# Altium PCB ti_lab_v1.0.PcbDoc
Units mil, origin at the board's own origin, x right, y up, seen from the top; angles counter-clockwise.
Board outline 7140.03 x 8380.03 mil, 2 copper layers (Top Layer, Bottom Layer); 143 components, 45 nets, 464 pads, 229 vias.
Unrouted connection lines stored in the file: 7.
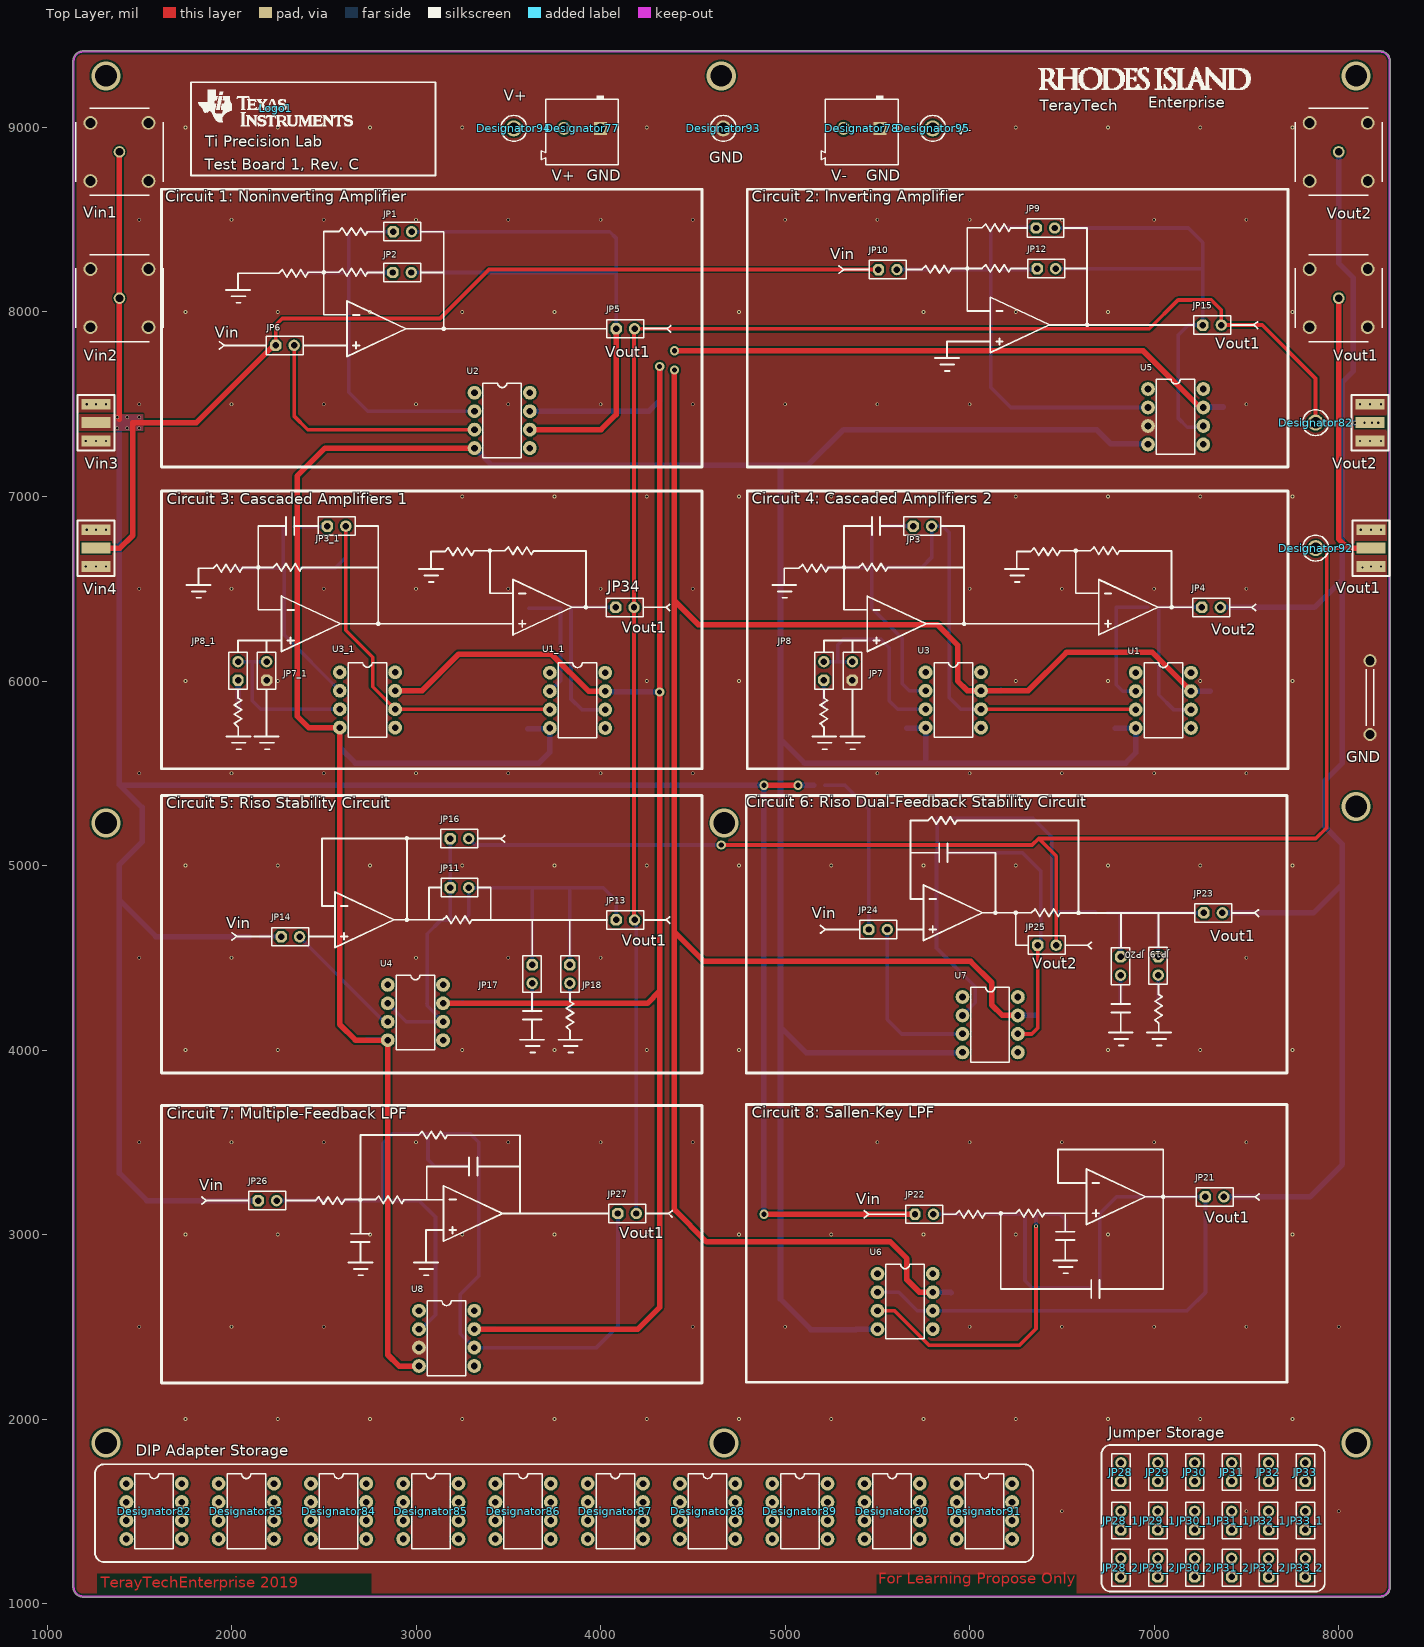
[diagram p0: Top Layer view]
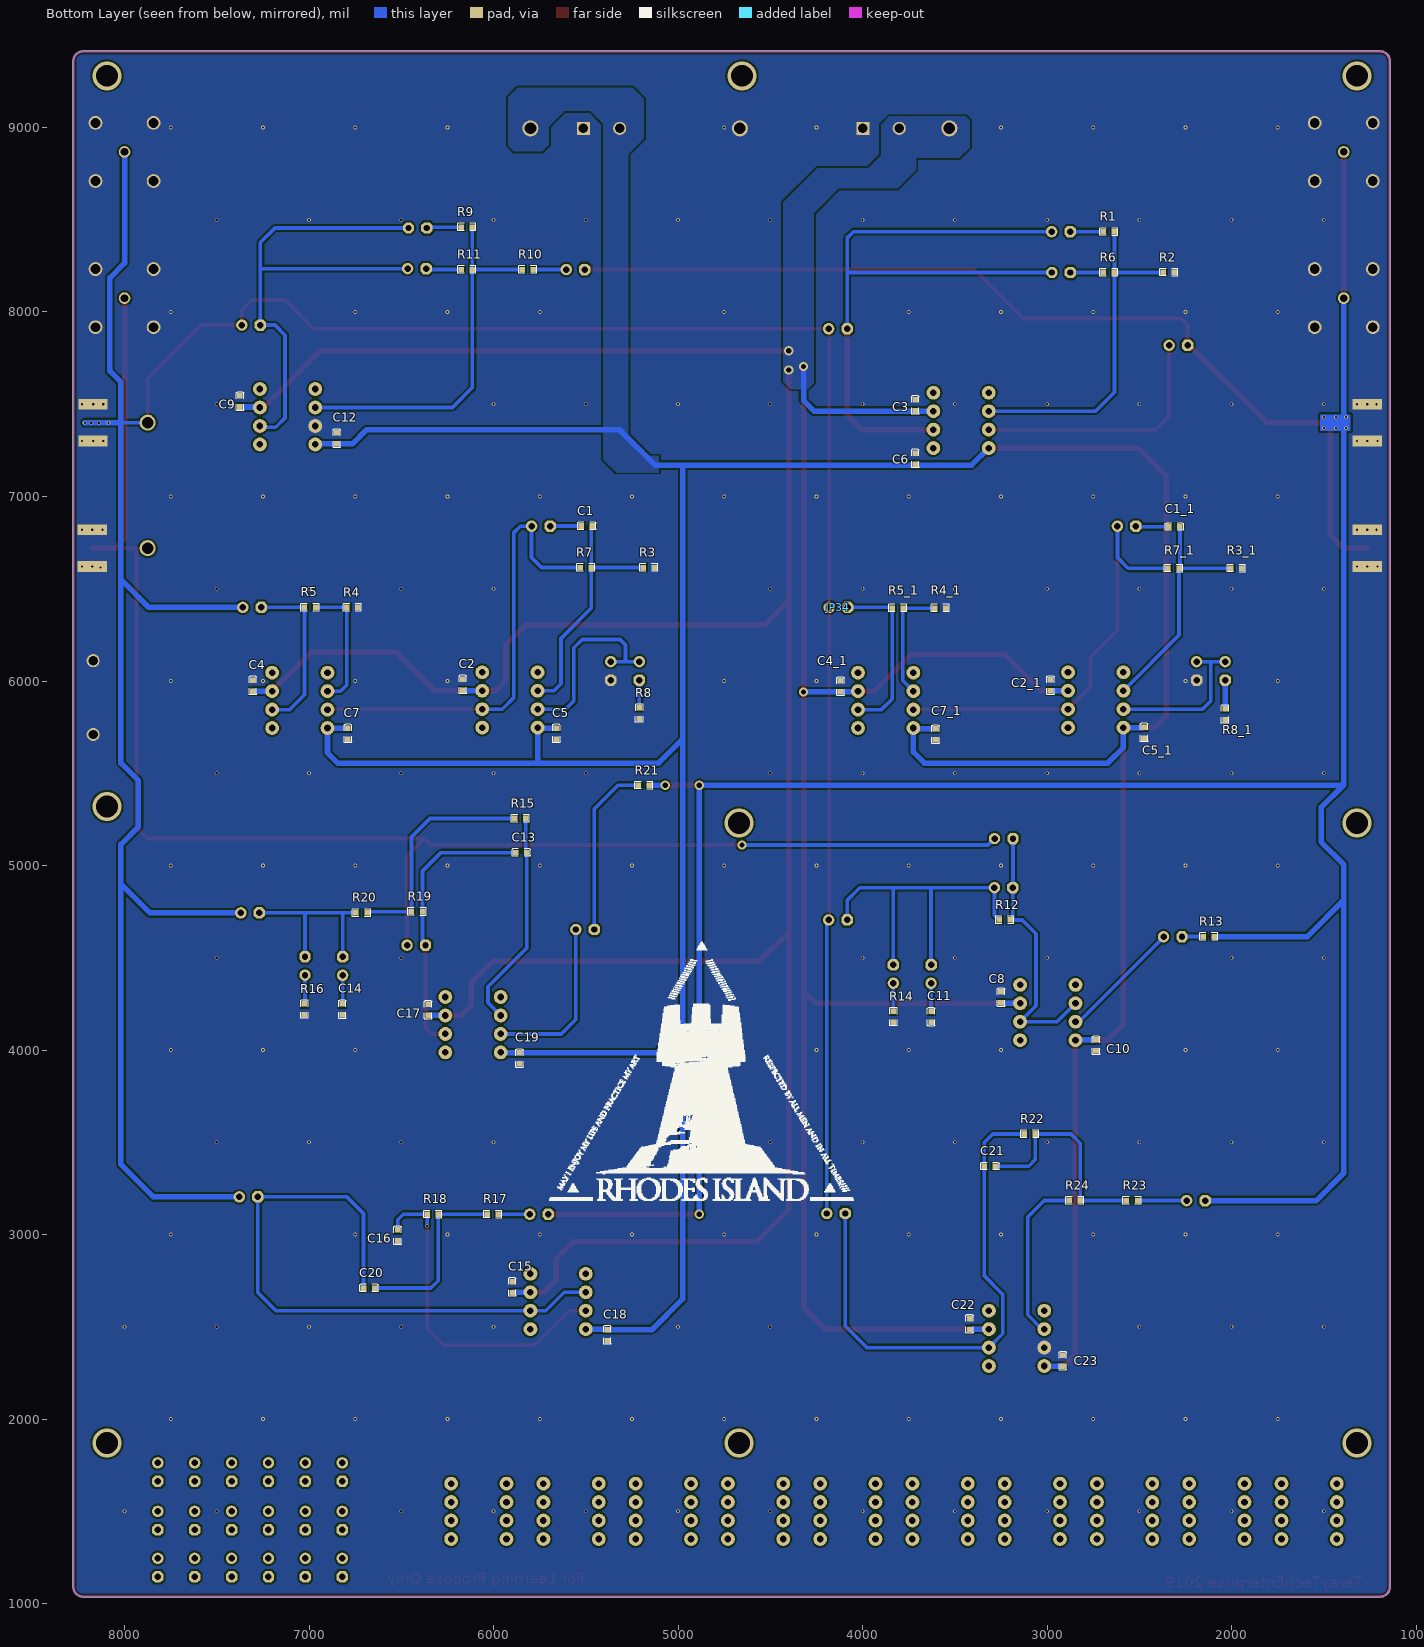
[diagram p1: Bottom Layer view, seen from below]
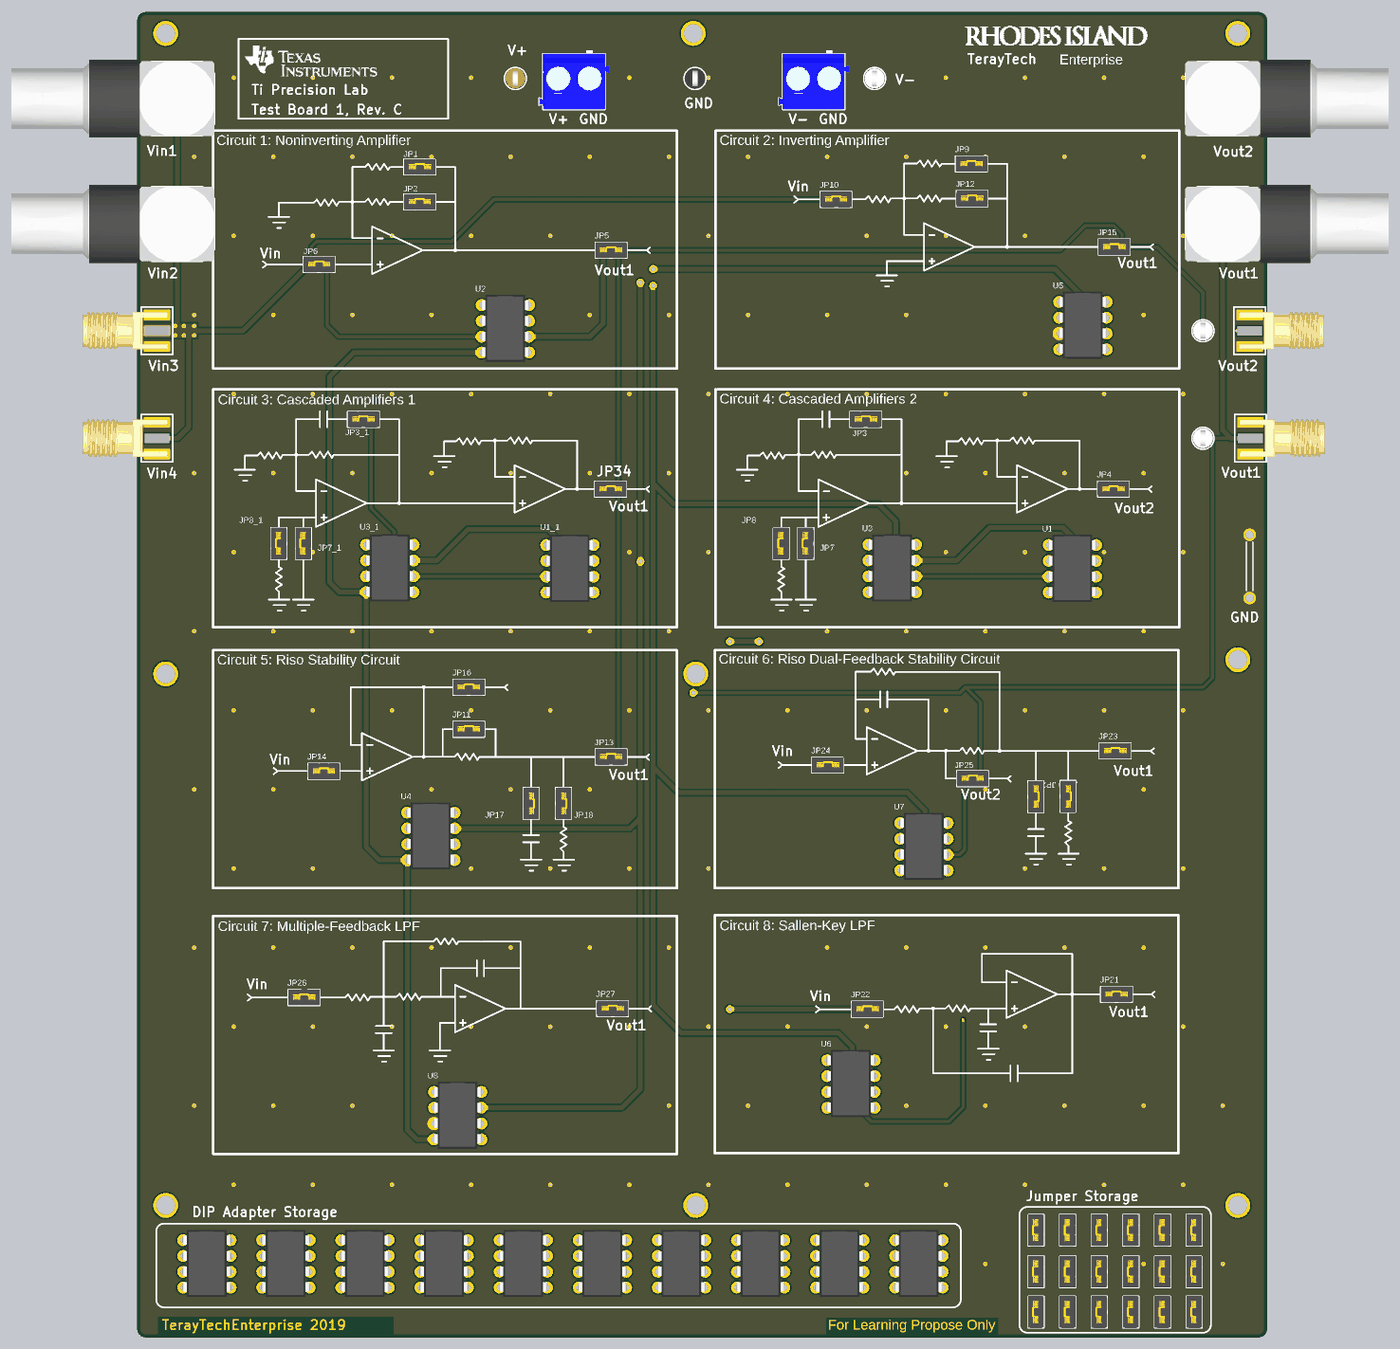
[diagram p2: 3D render of the assembled board from above, using the file's embedded part models]
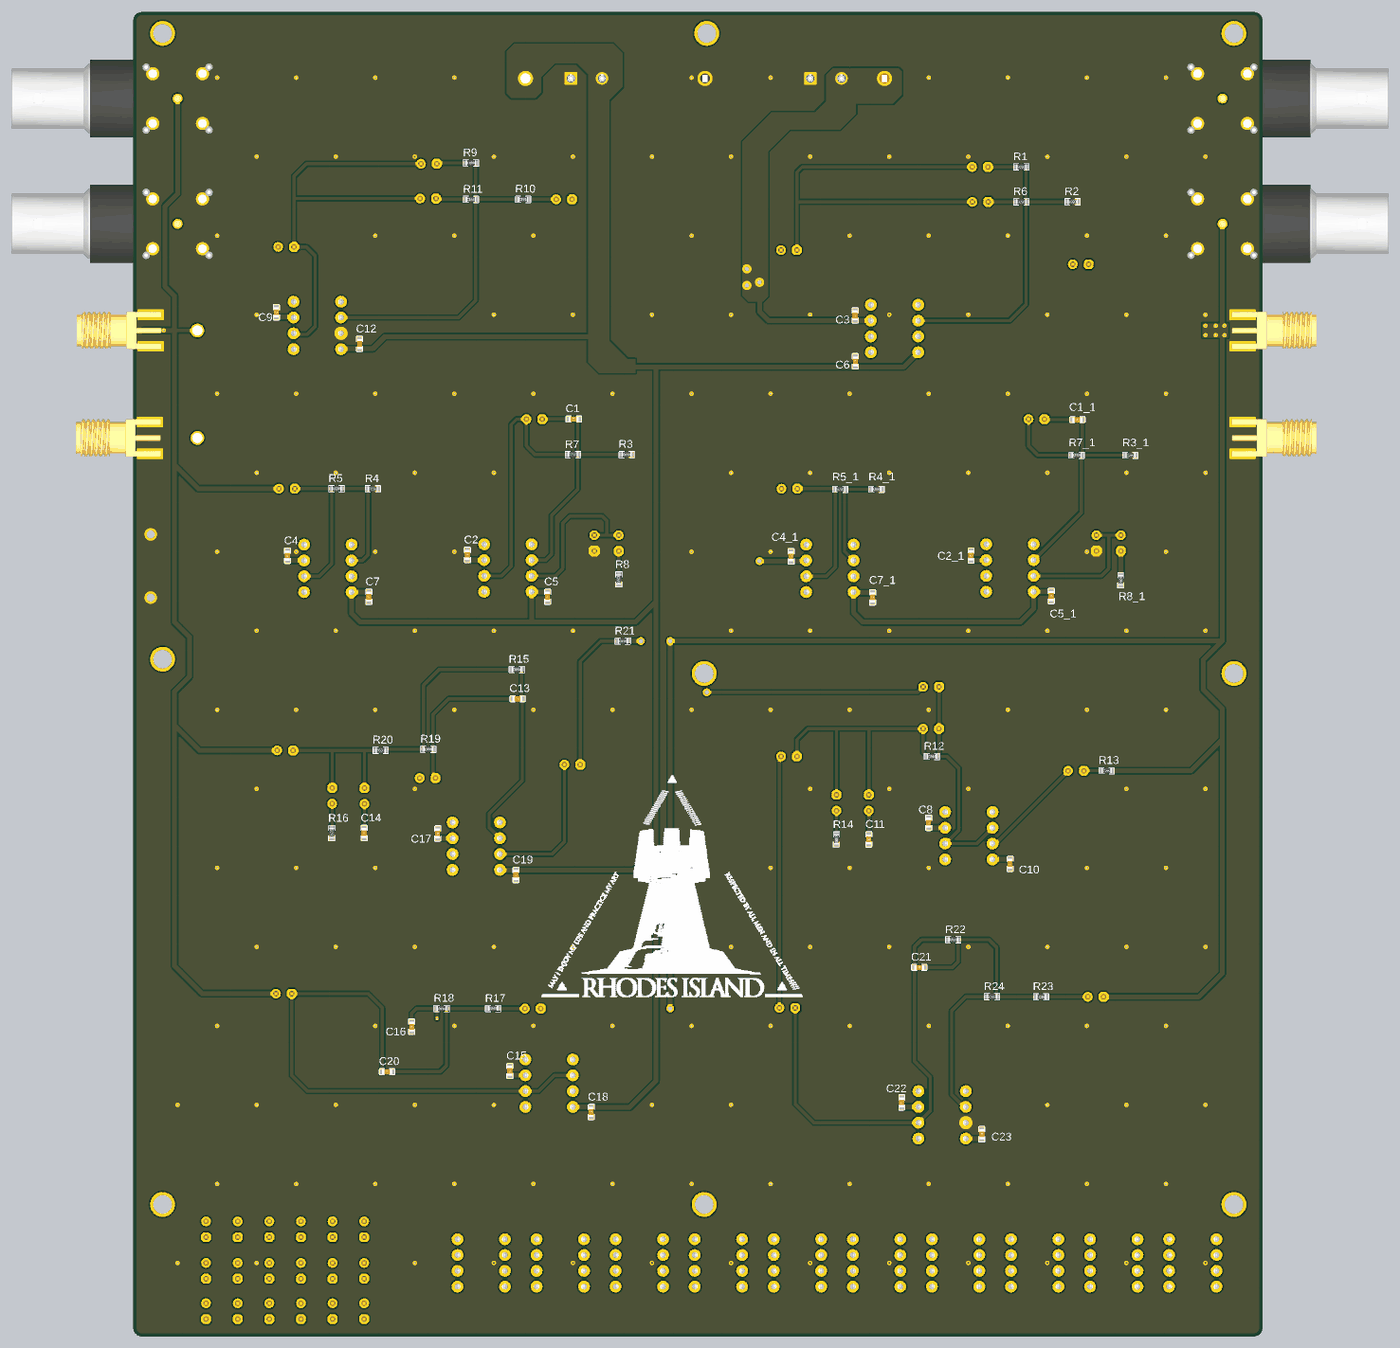
[diagram p3: 3D render of the assembled board from below, using the file's embedded part models]

## Layer stack, top to bottom
Top Solder: solder mask 0.4, Solder Resist, Dk 3.5
Top Layer: signal copper 1.4
Dielectric 1: dielectric 12.6, FR-4, Dk 4.8
Bottom Layer: signal copper 1.4
Bottom Solder: solder mask 0.4, Solder Resist, Dk 3.5

## Board outline
1139.98,1090 ccw(c1195,1090) 1195,1034.98 8225,1034.98 ccw(c8225,1090) 8280.01,1090 8280.01,9360 ccw(c8225,9360) 8225,9415.01 1195,9415.01 ccw(c1195,9360) 1139.98,9360

## Design rules (kind name [scope] priority, off if disabled: settings)
Clearance [All] p1: gap=10 ignorepadtopadclearanceinfootprint=FALSE except(0: Arc-Hole Track-Hole SMDPad-Hole THPad-Hole Via-Hole Fill-Hole Poly-Hole Region-Hole Text-Hole)
PolygonConnect [All] p1: connectstyle=Direct reliefconductorwidth=10 reliefentries=4 polygonreliefangle="90 Angle" airgapwidth=10
RoutingVias [All] p1: holewidth=28 width=50 viastyle="Through Hole" minholewidth=28 minwidth=50 maxholewidth=28 maxwidth=50
SolderMaskExpansion [All] p1: expansion=4
Width [All] p1: maxlimit=30 minlimit=10 preferedwidth=20 minimp=50.000000 maximp=50.000000 favimp=50.000000
30 further rules are at their usual default settings.

## Classes and differential pairs
component class ti_lab: C1 C2 C3 C4 C5 C6 C7 C8 C9 C10 C11 C12 C13 C14 C15 C16 C17 C18 C19 C20 C21 C22 C23 JP1 JP2 JP3 JP4 JP5 JP6 JP7 JP8 JP9 JP10 JP11 JP12 JP13 JP14 JP15 JP16 JP17 JP18 JP19 JP20 JP21 JP22 JP23 JP24 JP25 JP26 JP27 Logo1 R1 R2 R3 R4 R5 R6 R7 R8 R9 R10 R11 R12 R13 R14 R15 R16 R17 R18 R19 R20 R21 R22 R23 R24 U1 U2 U3 U4 U5 U6 U7 U8 Vin4 Vout1 Vout2

## Components (designator, comment, footprint, x,y, rotation, side; value= is the part's Value field where it differs from the comment)
C1 "0.01uF" 0603_C 5495,6840 r0 bottom value=104
C1_1 "0.01uF" 0603_C 2310,6836 r0 bottom value=104
C2 "1uF" 0603_C 6167.28,5980 r90 bottom value=104
C2_1 "1uF" 0603_C 2982.28,5976 r90 bottom value=104
C3 "1uF" 0603_C 3715,7495 r90 bottom value=104
C4 "1uF" 0603_C 7305,5975 r90 bottom value=104
C4_1 "1uF" 0603_C 4120,5971 r90 bottom value=104
C5 "1uF" 0603_C 5660,5715 r90 bottom value=104
C5_1 "1uF" 0603_C 2475,5720 r90 bottom value=104
C6 "1uF" 0603_C 3715,7205 r270 bottom value=104
C7 "1uF" 0603_C 6790,5715 r90 bottom value=104
C7_1 "1uF" 0603_C 3605,5711 r90 bottom value=104
C8 "1uF" 0603_C 3250,4285 r90 bottom value=104
C9 "1uF" 0603_C 7375,7515 r90 bottom value=104
C10 "1uF" 0603_C 2735,4025 r90 bottom value=104
C11 "1uF" 0603_C 3629,4180 r90 bottom value=104
C12 "1uF" 0603_C 6850,7315 r270 bottom value=104
C13 "1uF" 0603_C 5850,5070 r0 bottom value=104
C14 "1uF" 0603_C 6820,4220 r90 bottom value=104
C15 "1uF" 0603_C 5899,2715 r90 bottom value=104
C16 "1uF" 0603_C 6520,2995 r270 bottom value=104
C17 "1uF" 0603_C 6355,4217.28 r90 bottom value=104
C18 "1uF" 0603_C 5384,2455 r90 bottom value=104
C19 "1uF" 0603_C 5860,3955 r90 bottom value=104
C20 "0.01uF" 0603_C 6675,2710 r0 bottom value=104
C21 "10nF" 0603_C 3310,3370 r0 bottom value=104
C22 "1uF" 0603_C 3420,2515 r90 bottom value=104
C23 "1uF" 0603_C 2915,2315 r270 bottom value=104
Designator77 "Comment" Wurth_691101710002 3900,8995 r180 top
Designator78 "Comment" Wurth_691101710002 5415,8995 r180 top
Designator82 "Comment" Keystone5007 7875,7400 r270 top
Designator82 "Comment" DIP-8 1583.54,1522.72 r270 top
Designator83 "Comment" DIP-8 2083.54,1522.72 r270 top
Designator84 "Comment" DIP-8 2583.54,1522.72 r270 top
Designator85 "Comment" DIP-8 3083.54,1522.72 r270 top
Designator86 "Comment" DIP-8 3583.54,1522.72 r270 top
Designator87 "Comment" DIP-8 4083.54,1522.72 r270 top
Designator88 "Comment" DIP-8 4583.54,1522.72 r270 top
Designator89 "Comment" DIP-8 5083.54,1522.72 r270 top
Designator90 "Comment" DIP-8 5583.54,1522.72 r270 top
Designator91 "Comment" DIP-8 6083.54,1522.72 r270 top
Designator92 "Comment" Keystone5007 7875,6720 r270 top
Designator93 "Comment" Keystone5006 4665,8995 r270 top
Designator94 "Comment" Keystone5005 3530,8995 r270 top
Designator95 "Comment" Keystone5007 5800,8995 r270 top
GND "Comment" Harwin_D3082-05 8170,5910 r90 top
JP1 "jumper" jumper#1 2875.51,8435 r0 top
JP2 "jumper" jumper#1 2874,8214 r0 top
JP3 "jumper" jumper#1 5694,6839 r0 top
JP3_1 "jumper" jumper#1 2519,6839 r0 top
JP4 "jumper" jumper#1 7259,6399 r0 top
JP5 "jumper" jumper#1 4084,7909 r0 top
JP6 "jumper" jumper#1 2239,7819 r0 top
JP7 "jumper" jumper#1 5365,6005 r90 top
JP7_1 "jumper" jumper#1 2190,6005 r90 top
JP8 "jumper" jumper#1 5210,6005 r90 top
JP8_1 "jumper" jumper#1 2035,6005 r90 top
JP9 "jumper" jumper#1 6361,8455 r0 top
JP10 "jumper" jumper#1 5506,8230 r0 top
JP11 "jumper" jumper#1 3185.46,4880 r0 top
JP12 "jumper" jumper#1 6366,8235 r0 top
JP13 "jumper" jumper#1 4084,4705 r0 top
JP14 "jumper" jumper#1 2269,4614 r0 top
JP15 "jumper" jumper#1 7264,7929 r0 top
JP16 "jumper" jumper#1 3185,5146 r0 top
JP17 "jumper" jumper#1 3629,4462 r270 top
JP18 "jumper" jumper#1 3833.12,4462 r270 top
JP19 "jumper" jumper#1 6818,4505.12 r270 top
JP20 "jumper" jumper#1 7022.12,4506.12 r270 top
JP21 "jumper" jumper#1 7278,3204 r0 top
JP22 "jumper" jumper#1 5704,3110 r0 top
JP23 "jumper" jumper#1 7270,4743.24 r0 top
JP24 "jumper" jumper#1 5454,4653.12 r0 top
JP25 "jumper" jumper#1 6369,4568.12 r0 top
JP26 "jumper" jumper#1 2144,3184 r0 top
JP27 "jumper" jumper#1 4094,3114 r0 top
JP28 "jumper" jumper#1 6820,1663 r90 top (schematic designator JP21)
JP28_1 "jumper" jumper#1 6820,1400 r90 top (schematic designator JP21)
JP28_2 "jumper" jumper#1 6820,1145 r90 top (schematic designator JP21)
JP29 "jumper" jumper#1 7020,1663 r90 top (schematic designator JP21)
JP29_1 "jumper" jumper#1 7020,1400 r90 top (schematic designator JP21)
JP29_2 "jumper" jumper#1 7020,1145 r90 top (schematic designator JP21)
JP30 "jumper" jumper#1 7220,1663 r90 top (schematic designator JP21)
JP30_1 "jumper" jumper#1 7220,1400 r90 top (schematic designator JP21)
JP30_2 "jumper" jumper#1 7220,1145 r90 top (schematic designator JP21)
JP31 "jumper" jumper#1 7420,1663 r90 top (schematic designator JP21)
JP31_1 "jumper" jumper#1 7420,1400 r90 top (schematic designator JP21)
JP31_2 "jumper" jumper#1 7420,1145 r90 top (schematic designator JP21)
JP32 "jumper" jumper#1 7620,1663 r90 top (schematic designator JP21)
JP32_1 "jumper" jumper#1 7620,1400 r90 top (schematic designator JP21)
JP32_2 "jumper" jumper#1 7620,1145 r90 top (schematic designator JP21)
JP33 "jumper" jumper#1 7820,1663 r90 top (schematic designator JP21)
JP33_1 "jumper" jumper#1 7820,1400 r90 top (schematic designator JP21)
JP33_2 "jumper" jumper#1 7820,1145 r90 top (schematic designator JP21)
JP34 "jumper" jumper#2 4081.05,6399 r0 bottom (schematic designator JP4)
Logo1 "Texas Instruments" TI_Stacked_Overlay_Small 2239,9105 r0 top
R1 "10K" 0603_R 2665,8435 r0 bottom value=1K
R2 "1K" 0603_R 2340,8215 r0 bottom
R3 "1K" 0603_R 5160,6615 r0 bottom
R3_1 "1K" 0603_R 1975,6611 r0 bottom
R4 "1K" 0603_R 6765,6399 r0 bottom
R4_1 "1K" 0603_R 3580,6395 r0 bottom
R5 "20K" 0603_R 6995,6399 r0 bottom value=1K
R5_1 "20K" 0603_R 3810,6395 r0 bottom value=1K
R6 "100K" 0603_R 2665,8214 r0 bottom value=1K
R7 "100K" 0603_R 5500,6615 r0 bottom value=1K
R7_1 "100K" 0603_R 2315,6611 r0 bottom value=1K
R8 "5K" 0603_R 5210,5825 r90 bottom value=1K
R8_1 "5K" 0603_R 2035,5820 r90 bottom value=1K
R9 "10K" 0603_R 6145,8460 r0 bottom value=1K
R10 "1K" 0603_R 5815,8230 r0 bottom
R11 "100K" 0603_R 6145,8230 r0 bottom value=1K
R12 "100" 0603_R 3230,4705 r0 bottom value=1K
R13 "100" 0603_R 2125,4615 r0 bottom value=1K
R14 "100" 0603_R 3833.12,4180 r90 bottom value=1K
R15 "4.87K" 0603_R 5855,5255 r0 bottom value=1K
R16 "100" 0603_R 7025,4220 r90 bottom value=1K
R17 "4.87K" 0603_R 6005,3110 r0 bottom value=1K
R18 "14.7K" 0603_R 6330,3110 r0 bottom value=1K
R19 "100" 0603_R 6415,4750 r0 bottom value=1K
R20 "4.99" 0603_R 6715.8,4743.24 r180 bottom value=1K
R21 "100" 0603_R 5185,5435 r0 bottom value=1K
R22 "11.3K" 0603_R 3095,3545 r0 bottom value=1K
R23 "11.3K" 0603_R 2540,3184 r0 bottom value=1K
R24 "5.76K" 0603_R 2850,3185 r0 bottom value=1K
U1 "TI-OPA-8_1" DIP-8 7053.54,5917.72 r270 top
U1_1 "TI-OPA-8_1" DIP-8 3878.54,5917.72 r270 top
U2 "TI-OPA-8_1" DIP-8 3470,7435 r270 top
U3 "TI-OPA-8_1" DIP-8 5915,5920 r270 top
U3_1 "TI-OPA-8_1" DIP-8 2740,5920 r270 top
U4 "TI-OPA-8_1" DIP-8 3000,4226 r270 top
U5 "TI-OPA-8_1" DIP-8 7120,7455 r270 top
U6 "TI-OPA-8_1" DIP-8 5654,2660 r270 top
U7 "TI-OPA-8_1" DIP-8 6115,4160 r270 top
U8 "TI-OPA-8_1" DIP-8 3169,2460 r270 top
Vin1 "Comment" BNC-8X8 1392.52,8867.48 r90 top
Vin2 "Comment" BNC-8X8 1392.52,8075 r90 top
Vin3 "SMA-KHD" SMA-2 1265,7400 r270 top (schematic designator IN1)
Vin4 "SMA-KHD" SMA-2 1265,6720 r270 top
Vout1 "Comment" BNC-8X8 8000,8075 r270 top
Vout1 "SMA-KHD" SMA-2 8175,6720 r90 top (schematic designator OUT1)
Vout2 "Comment" BNC-8X8 8000,8867.48 r270 top
Vout2 "SMA-KHD" SMA-2 8170,7400 r90 top (schematic designator OUT2)

## Footprints (in the part's own frame and the unit in brackets; to place one, negate y for a bottom-side part, rotate by r counter-clockwise, add the part's x,y. Pads: shape width x height; smd on the part's side, far side on the other; paste and mask are expansions set on the pad)
0603_C [mil] "Capacitor"
  rect 30x30 smd: 1(-30,0) 2(30,0)
  silkscreen extent -50,-20 50,20, body extent -51,-18 52,21, height 35
0603_R [mil]
  rect 30x30 smd: 1(-30,0) 2(30,0)
  silkscreen extent -49,-20 49,21, body extent -32,-16 31,16, height 18
BNC-8X8 [mm]
  round 1.6 hole 1.05: 1(0,0)
  round 1.9 hole 1.35: MH(-4,-4) MH(-4,4) MH(4,-4) MH(4,4)
  silkscreen extent -6,-6 6,6, body extent -6.25,-6 6.25,26.6, height 15.25
DIP-8 [mil]
  round 75 hole 36: 1(-127.28,-153.54) 2(-27.28,-153.54) 3(72.72,-153.54) 4(172.72,-153.54) 5(172.72,146.46) 6(72.72,146.46) 7(-27.28,146.46) 8(-127.28,146.46)
  silkscreen extent -180,-108 225,101, body extent -193,-158 233,148, height 177
Harwin_D3082-05 [mm] "Shorting Plug, 10.16mm spacing, TH"
  round 1.8 hole 1.3: 1(-5.08,0) 2(5.08,0)
  silkscreen extent -3.9,-0.53 3.9,0.53, body extent -5.6,-0.52 5.61,0.52, height 6.63
jumper#1 [mil]
  round 1 on Mech3: 0(51,1)
  oct 62x62 hole 35: 1(0,0)
  round 62 hole 35: 2(100,0)
  silkscreen extent -50,-50 150,50, body extent -50,-50 151,51, height 398
jumper#2 [mil]
  round 1 on Mech3: 0(51,-1)
  oct 62x62 hole 35: 1(0,0)
  round 62 hole 35: 2(100,0)
  body extent -50,-51 151,50, height 398
Keystone5005 [mil] "Keystone Compact loops"
  round 87 hole 63: 1(0,0)
  silkscreen extent -70,-70 70,70, body extent -63,-63 62,63, height 225
Keystone5006 [mil] "Keystone Compact loops"
  round 87 hole 63: 1(0,0)
  silkscreen extent -70,-70 70,70, body extent -63,-63 62,63, height 225
Keystone5007 [mil] "Keystone Compact loops"
  round 87 hole 63: 1(0,0)
  silkscreen extent -70,-70 70,70, body extent -63,-63 62,63, height 225
SMA-2 [mm]
  rect 1.5x4 all layers, no hole: 1(-2.54,0) 1(2.54,0)
  rect 1.5x4 smd: 2(0,0)
  silkscreen extent -3.81,-2.54 3.81,2.54, body extent -3,-11.89 3,1.71, height 3.2
TI_Stacked_Overlay_Small [mil]
  silkscreen extent -418,-98 418,98
Wurth_691101710002 [mm] "Terminal Block, 5 mm, 2x1, TH"
  rect 1.8x1.8 hole 1.3: 1(-2.5,0)
  round 1.8 hole 1.3: 2(2.5,0)
  silkscreen extent -5,-4.5 5.6,5, body extent -5.6,-4 5.6,5, height 12.5

## Part data
C1 C1_1 C2 C2_1 C3 C4 C4_1 C5 C5_1 C6 C7 C7_1 C8 C9 C10 C11 C12 C13 C14 C15 C16 C17 C18 C19 C20 C21 C22 C23: library part CAP, "Capacitor", LatestRevisionDate=17-Jul-2002, LatestRevisionNote="Re-released for DXP Platform.", PackageReference=RAD-0.3, Published=8-Jun-2000, Publisher="Altium Limited"
JP1 JP2 JP3 JP3_1 JP4 JP5 JP6 JP7 JP7_1 JP8 JP8_1 JP9 JP10 JP11 JP12 JP13 JP14 JP15 JP16 JP17 JP18 JP19 JP20 JP21 JP22 JP23 JP24 JP25 JP26 JP27 JP28 JP28_1 JP28_2 JP29 JP29_1 JP29_2 JP30 JP30_1 JP30_2 JP31 JP31_1 JP31_2 JP32 JP32_1 JP32_2 JP33 JP33_1 JP33_2 JP34: "t跳线帽"
Logo1: library part TI_Logo, "Texas Instrument Corporate Signature", ClassName=Logo, LatestRevisionDate=2011-10-25, LatestRevisionNote="Added ClassName of Logo.", Published=2009-03-03, Publisher="National Semiconductor", SymbolCreator=codlsc, SymbolVersion=2011-08-22
R1 R2 R3 R3_1 R4 R4_1 R5 R5_1 R6 R7 R7_1 R8 R8_1 R9 R10 R11 R12 R13 R14 R15 R16 R17 R18 R19 R20 R21 R22 R23 R24: library part RES, "Resistor", Published=8-Jun-2000, Publisher="Altium Limited", Revision="July-2002: Re-released for DXP Platform."
Vin3 Vin4 Vout1 Vout2: library part SMA_KHD

## Via types
v1: diameter 20, hole 12, Top Layer to Bottom Layer, 212 vias
v2: diameter 157.48, hole 118.11, Top Layer to Bottom Layer, 9 vias
v3: diameter 50, hole 28, Top Layer to Bottom Layer, 8 vias

## Nets (pads, with @x,y where several pads share a name; then routed paths per layer and width w, separated by ;. In a path a pad name is that pad's centre, name@x,y a point inside that pad or via, vN(x,y) a via of type N, cw(c..) or ccw(c..) an arc to the next point about the centre after c; other vN are vias at no path point)
GND: C2.2 C2_1.2 C3.2 C4.2 C4_1.2 C5.1 C5_1.1 C6.1 C7.1 C7_1.1 C8.2 C9.2 C10.1 C11.1 C12.1 C14.1 C15.2 C16.2 C17.2 C18.1 C19.1 C22.2 C23.1 Designator77.1 Designator78.1 Designator93.1 GND.1 GND.2 JP7.1 JP7_1.1 R2.1 R3.1 R3_1.1 R4.1 R4_1.1 R8.1 R8_1.1 R14.1 R16.1 U5.3 U8.3 Vin1.MH Vin2.MH Vin3.1 Vin4.1 Vout1.1@8175,6620 Vout1.1@8175,6820 Vout1.MH Vout2.1@8170,7300 Vout2.1@8170,7500 Vout2.MH
  other v1: 1500,1500 2000,1500 2500,1500 3000,1500 3500,1500 4000,1500 4500,1500 5000,1500 5500,1500 6000,1500 6500,1500 7500,1500 8000,1500 1750,2000 2250,2000 2750,2000 3250,2000 3750,2000 4250,2000 4750,2000 5250,2000 5750,2000 6250,2000 6750,2000 7250,2000 7750,2000 1500,2500 2000,2500 2500,2500 4500,2500 5000,2500 6000,2500 6500,2500 7000,2500 7500,2500 8000,2500 1750,3000 2250,3000 2750,3000 3250,3000 3750,3000 4250,3000 4750,3000 5250,3000 5750,3000 6250,3000 6750,3000 7750,3000 1500,3500 2000,3500 2500,3500 3000,3500 3500,3500 4000,3500 4500,3500 5500,3500 6000,3500 6500,3500 7000,3500 7500,3500 1750,4000 2250,4000 3250,4000 3750,4000 4250,4000 4750,4000 6750,4000 7250,4000 7750,4000 1500,4500 2000,4500 3000,4500 3500,4500 4000,4500 6500,4500 7500,4500 1750,5000 2250,5000 2750,5000 3250,5000 3750,5000 4250,5000 4750,5000 5250,5000 5750,5000 6250,5000 6750,5000 7250,5000 7750,5000 1500,5500 2000,5500 2500,5500 3000,5500 3500,5500 4000,5500 4500,5500 5500,5500 6000,5500 6500,5500 7000,5500 7500,5500 1750,6000 2250,6000 4250,6000 4750,6000 6250,6000 6750,6000 7250,6000 7750,6000 1500,6500 2000,6500 2500,6500 3000,6500 3500,6500 4000,6500 4500,6500 6000,6500 6500,6500 7000,6500 7500,6500 8130,6615 1210,6620 1265,6620 1320,6620 8175,6620 8230,6620 1215,6820 1265,6820 1320,6820 8120,6820 8175,6820 8230,6820 1750,7000 2250,7000 2750,7000 3250,7000 3750,7000 4250,7000 4750,7000 5250,7000 5750,7000 6250,7000 6750,7000 7250,7000 7750,7000 1210,7300 1265,7300 1320,7300 8115,7300 8170,7300 8230,7300 1215,7500 1265,7500 1320,7500 1500,7500 2000,7500 2500,7500 3000,7500 3500,7500 4000,7500 4500,7500 5000,7500 5500,7500 6000,7500 7500,7500 8115,7500 8170,7500 8230,7500 1750,8000 2250,8000 2750,8000 3250,8000 3750,8000 4750,8000 5750,8000 6250,8000 6750,8000 7750,8000 1500,8500 2000,8500 2500,8500 3000,8500 3500,8500 4000,8500 4500,8500 5000,8500 5500,8500 6000,8500 6500,8500 7000,8500 7500,8500 1750,9000 2250,9000 2750,9000 3250,9000 4250,9000 4750,9000 6250,9000 6750,9000 7250,9000 7750,9000
NetC1_1: C1.1 C1_1.1 R3.2 R3_1.2 R7.1 R7_1.1 U3.2 U3_1.2 | length 2645.2
  Bottom Layer w20: R3_1.2 R7_1.1 ; C1_1.1 2280,6616 R7_1.1 ; U3_1.2 2285,6248.74 R7_1.1 ; R3.2@5190,6610 5195,6615 R7.1 ; C1.1 5470,6835 R7.1 ; U3.2 5672.72,5947.28 5635,5985 5635,6230 5470,6395 R7.1
NetC1_2: C1.2 C1_1.2 JP3.1 JP3_1.1 | length 349.7
  Bottom Layer w20: C1_1.2 2516,6836 JP3_1.1 ; C1.2 5693,6840 JP3.1
NetC11_2: C11.2 JP17.2 | length 152
  Bottom Layer w20: C11.2 JP17.2
NetC13_1: C13.1 R15.1 U7.2 | length 1185.2
  Bottom Layer w20: R15.1 5825,5075 C13.1 5820,4553.28 6030,4343.28 6030,4255.83 U7.2
NetC13_2: C13.2 JP25.1 R19.1 U7.6 | length 1524.7
  Top Layer w20: U7.6 6337.28,4087.28 6369,4119 JP25.1
  Bottom Layer w20: C13.2 6285,5070 6385,4970 R19.1 6385,4584.12 JP25.1
NetC14_2: C14.2 JP19.2 | length 155.9
  Bottom Layer w20: JP19.2 6818,4252 C14.2
NetC16_1: C16.1 R18.2 U6.3 | length 1821.8
  Top Layer w20: U6.3 5592.72,2587.28 5780,2400 6270,2400 6360,2490 v1(6360,3045)
  Bottom Layer w20: v1(6360,3045) R18.2 6490,3110 6520,3080 C16.1
NetC20_1: C20.1 R17.2 R18.1 | length 986.6
  Bottom Layer w20: R17.2 R18.1 6300,2750 6340,2710 C20.1
NetC20_2: C20.2 JP21.1 U6.2 U6.6 | length 3391.8
  Bottom Layer w20: U6.2 5616.72,2687.28 5716.72,2587.28 U6.6 7178.74,2587.28 7278,2686.54 JP21.1 6795,3204 6705,3114 C20.2
NetC21_1: C21.1 R22.1 R23.2 R24.1 | length 1184.2
  Bottom Layer w20: R23.2 R24.1@2809,3184 ; R24.1 2820,3495 2870,3545 R22.1 3065,3405 3100,3370 C21.1
NetC21_2: C21.2 JP27.1 R22.2 U8.6 | length 2855.9
  Bottom Layer w20: R22.2 3295,3545 3340,3500 C21.2 3340,2775 3240,2675 3240,2462.74 U8.6 3977.28,2387.28 4094,2504 JP27.1
NetIN1_2: JP6.1 JP10.1 JP22.1 JP26.1 R13.1 R21.1 Vin1.1 Vin2.1 Vin3.2 Vin4.2 | length 20079.7
  Top Layer w20: JP6.1@2239,7830 2239,7929 2275,7965 3130,7965 3395,8230 JP10.1
  Top Layer w30: Vin4.2 1395,6720 1465,6790 1465,7400 1809,7400 JP6.1@2239,7830 ; 1392.52,7417.48 Vin2.1 Vin1.1 ; v3(4885,3110) JP22.1 ; v3(4885,5435) v3(5070,5435)
  Bottom Layer w30: Vin2.1@1400,8070 1392.52,8062.52 1392.52,7370 1392.52,5440 ; R13.1 1590,4615 1392.52,4812.48 ; JP26.1 1541,3184 1392.52,3332.48 1392.52,4812.48 ; v3(4885,3110) v3(4885,5435) 1397.52,5435 1392.52,5440 ; v3(5070,5435) R21.1 ; 1392.52,4812.48 1392.52,5005.27 1515,5127.75 1515,5315 1392.52,5437.48 1392.52,5440
  other v1: 1380,7370 1435,7370 1500,7370 1380,7430 1435,7430 1500,7430
NetJP1_1: JP1.1 R1.2 | length 180.5
  Bottom Layer w20: R1.2 JP1.1
NetJP1_2: JP1.2 JP2.2 JP5.1 U2.6 | length 3692.2
  Top Layer w30: U2.6 4002.28,7362.28 4084,7444 JP5.1
  Bottom Layer w20: JP2.2 4081,8214 4084,8211 ; JP1.2 4050,8435 4084,8401 4084,8211 ; JP5.1 4084,8211
NetJP2_1: JP2.1 R6.2 | length 179
  Bottom Layer w20: R6.2 JP2.1
NetJP3_2: JP3.2 JP3_1.2 R7.2 R7_1.2 U1.3 U1_1.3 U3.6 U3_1.6 | length 4908.4
  Top Layer w20: JP3_1.2 2619,6275.24 2765,6129.24 2765,5968.74 U3_1.6 3722.72,5847.28 U1_1.3 ; U3.6 6897.72,5847.28 U1.3
  Bottom Layer w20: R7_1.2 2561,6611 2619,6669 JP3_1.2 ; R7.2 5740,6615 5794,6669 JP3.2 5856,6839 5890,6805 5890,5910 5952.72,5847.28 U3.6
NetJP4_1: JP4.1 JP34.1 R5.2 R5_1.2 U1.6 U1_1.6 | length 1860.3
  Bottom Layer w20: U1_1.6 3897.28,5845 3840,5902.28 R5_1.2 3844,6399 JP34.1 ; U1.6 7105,5845 7025,5925 R5.2 JP4.1
NetJP4_2: Designator82.1@7875,7400 JP4.2 JP5.2 JP13.2 JP15.2 JP21.2 JP23.2 JP27.2 JP34.2 Vout2.1@8000,8867.48 Vout2.2 | length 17139.3
  Top Layer w20: JP13.2@4181.05,4705 JP34.2 4181.05,7909 JP5.2 6974,7909 7130,8065 7310,8065 7364,8011 JP15.2 7586,7929 7875,7640 Designator82.1@7875,7400
  Bottom Layer w20: JP27.2 JP13.2@4194,4695 ; Designator82.1@7875,7400 8020,7400 8027.5,7400
  Bottom Layer w30: JP13.2 JP13.2@4194,4695 ; JP4.2 7869,6399 8020,6550 ; JP23.2 7863.24,4743.24 8020,4900 ; JP21.2 7844,3204 8020,3380 8020,4900 ; Vout2.1@8000,8867.48 8000,8265 8080,8185 8080,7680 8020,7620 8020,7400 8020,6550 ; 8027.5,7400 v1(8087.5,7400) v1(8140,7400) v1(8180,7400) v1(8215,7400) ; 8020,4900 8020,5115 7925,5210 7925,5460 8020,5555 8020,6550
NetJP6_2: JP6.2 U2.3 | length 1391
  Top Layer w20: JP6.2 2339,7436 2412.72,7362.28 U2.3
NetJP7_2: JP7.2 JP7_1.2 JP8.2 JP8_1.2 U3.3 U3_1.3 | length 1919.1
  Bottom Layer w20: JP8_1.2 2112.5,6105 ; JP7_1.2 2112.5,6105 ; U3_1.3 2157.72,5847.28 2112.5,5892.5 2112.5,6105 ; JP8.2 5285,6105 ; JP7.2 5285,6105 ; U3.3 5610,5847.28 5565,5892.28 5565,6180 5520,6225 5315,6225 5285,6195 5285,6105
NetJP8_1: JP8.1 JP8_1.1 R8.2 R8_1.2 | length 305
  Bottom Layer w20: R8.2 JP8.1
  Bottom Layer w30: R8_1.2 JP8_1.1
NetJP9_1: JP9.1 R9.2 | length 188.1
  Bottom Layer w20: R9.2 6356,8460 JP9.1
NetJP9_2: JP9.2 JP12.2 JP15.1 U5.6 | length 2849.2
  Bottom Layer w20: JP9.2 7185,8455 7264,8376 7264,8235 ; JP12.2 7264,8235 ; U5.6 7267.72,7382.28 7260.43,7375 7180,7375 7130,7425 7130,7874 7185,7929 JP15.1 7264,8235
NetJP10_2: JP10.2 R10.1 | length 179
  Bottom Layer w20: JP10.2 R10.1
NetJP11_1: JP11.1 JP16.1 R12.1 U4.2 U4.6 | length 1474.7
  Bottom Layer w20: U4.2 2946.46,4153.28 U4.6 3060,4239.74 3060,4255 ; 3058.28,4253.28 3060,4255 ; JP16.1 3185,4880.46 JP11.1 3185.46,4719.54 R12.1 3135,4705 3060,4630 3060,4255
NetJP11_2: JP11.2 JP13.1 JP17.1 JP18.1 R12.2 | length 1956
  Bottom Layer w20: R12.2 3285.46,4730.46 JP11.2 3629,4880 ; JP17.1 3629,4880 ; JP18.1 3833.12,4876.88 3830,4880 ; JP13.1 4084,4811 4015,4880 3830,4880 ; 3629,4880 3830,4880
NetJP12_1: JP12.1 R11.2 | length 193.1
  Bottom Layer w20: R11.2 6361,8230 JP12.1
NetJP14_1: JP14.1 R13.2 | length 114.4
  Bottom Layer w20: R13.2 2268,4615 JP14.1
NetJP14_2: JP14.2 U4.3 | length 670
  Bottom Layer w20: JP14.2 2369,4611 2826.72,4153.28 U4.3
NetJP16_2: Designator92.1 JP16.2 JP25.2 Vout1.1@8000,8075 Vout1.2 | length 8511.6
  Top Layer w20: v3(4654,5110.7) 6338.7,5110.7 6374,5146 ; JP25.2 6469,5051 6374,5146 ; Designator92.1 7935,6720 ; 8050,6720 7935,6720 ; 6374,5146 7876,5146 7935,5205 7935,6720
  Top Layer w30: Vout1.1@8000,8075 8000,6770 8050,6720 Vout1.2
  Bottom Layer w20: JP16.2 3320.3,5110.7 v3(4654,5110.7)
NetJP18_2: JP18.2 R14.2 | length 152
  Bottom Layer w20: R14.2 JP18.2
NetJP19_1: JP19.1 JP20.1 JP23.1 R20.1 | length 1001.5
  Bottom Layer w20: R20.1 6820,4743.24 ; JP19.1 6818,4741.24 6820,4743.24 ; JP20.1 7022.12,4740.35 7025,4743.24 ; JP23.1 7025,4743.24 ; 6820,4743.24 7025,4743.24
NetJP20_2: JP20.2 R16.2 | length 157.3
  Bottom Layer w20: JP20.2 7022.12,4252.88 R16.2
NetJP22_2: JP22.2 R17.1 | length 172.7
  Bottom Layer w20: JP22.2 5971,3110 R17.1@5975,3114
NetJP24_1: JP24.1 R21.2 | length 948
  Bottom Layer w20: R21.2 5325,5435 5454,5306 JP24.1 JP24.1@5452.12,4655
NetJP24_2: JP24.2 U7.3 | length 927.2
  Bottom Layer w20: JP24.2 5554,4166 5632.72,4087.28 U7.3
NetJP26_2: JP26.2 R23.1 | length 267.7
  Bottom Layer w20: JP26.2 2506,3184 R23.1@2510,3180
NetR1_1: R1.1 R2.2 R6.1 U2.2 | length 1861.7
  Bottom Layer w20: R2.2@2369,8210 2373,8214 R6.1 ; R1.1 R6.1 ; U2.2 2737.72,7462.28 2635,7565 R6.1
NetR4_2: R4.2 R4_1.2 R5.1 R5_1.1 U1.2 U1_1.2 | length 1353.4
  Bottom Layer w20: R4_1.2 R5_1.1 3782.5,6392.5 3782.5,6002.5 U1_1.2 ; U1.2 6830,5945 6795,5980 R4.2 R5.1
NetR9_1: R9.1 R10.2 R11.1 U5.2 | length 2033.1
  Bottom Layer w20: R10.2 6110,8230 6115,8235 R9.1 ; R11.1 6115,7590 6222.72,7482.28 U5.2
NetR15_2: R15.2 R19.2 R20.2 | length 1250
  Bottom Layer w20: R15.2 6345,5255 6445,5155 R19.2 6679.04,4750 R20.2
NetR24_2: R24.2 U8.2 | length 914
  Bottom Layer w20: R24.2 3015,3185 3105,3095 3105,2565 3027.28,2487.28 U8.2
V+: C2.1 C2_1.1 C3.1 C4.1 C4_1.1 C8.1 C9.1 C15.1 C17.1 C22.1 Designator77.2 Designator94.1 U1.7 U1_1.7 U2.7 U3.7 U3_1.7 U4.7 U5.7 U6.7 U7.7 U8.7 | length 25292.8
  Top Layer w30: U3_1.7 3032.28,5947.28 3230,6145 3735,6145 3935,5945 U1_1.7 ; U4.7 4253.28,4253.28 4320,4320 ; U8.7 4202.28,2487.28 4320,2605 4320,4320 ; v3(4320,7705) v3(4320,5941) 4320,4320 ; v3(4400,7685) 4400,6435 ; v3@4405,7790 6940,7790 7247.72,7482.28 U5.7 ; U6.7 5727.72,2687.28 5660,2755 5660,2870 5570,2960 4575,2960 4400,3135 4400,4640 ; U7.7 6177.72,4187.28 6120,4245 6120,4365 6005,4480 4560,4480 4400,4640 ; U1.7 6990,6155 6525,6155 6317.28,5947.28 U3.7 5987.72,5947.28 5935,6000 5935,6195 5825,6305 4530,6305 4400,6435 ; 4400,4640 4400,6435
  Bottom Layer w30: U3_1.7 2887.74,5946 C2_1.1 ; U4.7 3248.28,4253.28 C8.1 ; U8.7 C22.1@3422.72,2487.28 ; U2.7 4262.28,7462.28 4320,7520 v3(4320,7705) ; U1_1.7 4029,5941 C4_1.1 v3(4320,5941) ; U6.7 5896.72,2687.28 C15.1 ; U3.7 6167.28,5947.28 C2.1@6170,5950 ; U7.7 C17.1 ; U1.7 C4.1 ; U5.7 7269.17,7485 C9.1
  other v3: 4400,7790
V-: C5.2 C5_1.2 C6.2 C7.2 C7_1.2 C10.2 C12.2 C18.2 C19.2 C23.2 Designator78.2 Designator95.1 U1.4 U1_1.4 U2.4 U3.4 U3_1.4 U4.4 U5.4 U6.4 U7.4 U8.4 | length 20762.4
  Top Layer w30: U8.4 2907.72,2287.28 2846.46,2348.54 U4.4 2671.72,4053.28 2586.46,4138.54 U3_1.4 2417.72,5747.28 2355,5810 2355,7110 2507.28,7262.28 U2.4
  Bottom Layer w30: C5_1.2@2481.28,5747.28 U3_1.4 2586.46,5640 2671.46,5555 3665,5555 3725,5615 U1_1.4 3721,5741 C7_1.2 ; C10.2 2844.74,4055 U4.4 ; C23.2 3013.17,2285 U8.4 ; U2.4 3408.74,7170 4975,7170 ; U6.4 5386.28,2487.28 C18.2 5140,2485 4975,2650 4975,4125 ; C5.2 U3.4@5761.46,5745 ; U3.4 U3.4@5761.46,5745 ; U7.4 5959.17,3985 C19.2 5115,3985 4975,4125 ; C7.2 U1.4 6900,5610 6845,5555 5761.46,5555 ; U5.4 6963.74,7285 C12.2 6765,7285 6688.43,7361.57 5316.57,7361.57 5125,7170 4975,7170 ; 4975,4125 4975,5685 ; 4975,5685 4975,7170 ; 4975,5685 5105,5555 5761.46,5555 ; 5761.46,5555 U3.4@5761.46,5745
pads on no net: Designator82.1@1430,1650 Designator82.2 Designator82.3 Designator82.4 Designator82.5 Designator82.6 Designator82.7 Designator82.8 Designator83.1 Designator83.2 Designator83.3 Designator83.4 Designator83.5 Designator83.6 Designator83.7 Designator83.8 Designator84.1 Designator84.2 Designator84.3 Designator84.4 Designator84.5 Designator84.6 Designator84.7 Designator84.8 Designator85.1 Designator85.2 Designator85.3 Designator85.4 Designator85.5 Designator85.6 Designator85.7 Designator85.8 Designator86.1 Designator86.2 Designator86.3 Designator86.4 Designator86.5 Designator86.6 Designator86.7 Designator86.8 Designator87.1 Designator87.2 Designator87.3 Designator87.4 Designator87.5 Designator87.6 Designator87.7 Designator87.8 Designator88.1 Designator88.2 Designator88.3 Designator88.4 Designator88.5 Designator88.6 Designator88.7 Designator88.8 Designator89.1 Designator89.2 Designator89.3 Designator89.4 Designator89.5 Designator89.6 Designator89.7 Designator89.8 Designator90.1 Designator90.2 Designator90.3 Designator90.4 Designator90.5 Designator90.6 Designator90.7 Designator90.8 Designator91.1 Designator91.2 Designator91.3 Designator91.4 Designator91.5 Designator91.6 Designator91.7 Designator91.8 JP1.0 JP2.0 JP3.0 JP3_1.0 JP4.0 JP5.0 JP6.0 JP7.0 JP7_1.0 JP8.0 JP8_1.0 JP9.0 JP10.0 JP11.0 JP12.0 JP13.0 JP14.0 JP15.0 JP16.0 JP17.0 JP18.0 JP19.0 JP20.0 JP21.0 JP22.0 JP23.0 JP24.0 JP25.0 JP26.0 JP27.0 JP28.0 JP28.1 JP28.2 JP28_1.0 JP28_1.1 JP28_1.2 JP28_2.0 JP28_2.1 JP28_2.2 JP29.0 JP29.1 JP29.2 JP29_1.0 JP29_1.1 JP29_1.2 JP29_2.0 JP29_2.1 JP29_2.2 JP30.0 JP30.1 JP30.2 JP30_1.0 JP30_1.1 JP30_1.2 JP30_2.0 JP30_2.1 JP30_2.2 JP31.0 JP31.1 JP31.2 JP31_1.0 JP31_1.1 JP31_1.2 JP31_2.0 JP31_2.1 JP31_2.2 JP32.0 JP32.1 JP32.2 JP32_1.0 JP32_1.1 JP32_1.2 JP32_2.0 JP32_2.1 JP32_2.2 JP33.0 JP33.1 JP33.2 JP33_1.0 JP33_1.1 JP33_1.2 JP33_2.0 JP33_2.1 JP33_2.2 JP34.0 U1.1 U1.5 U1.8 U1_1.1 U1_1.5 U1_1.8 U2.1 U2.5 U2.8 U3.1 U3.5 U3.8 U3_1.1 U3_1.5 U3_1.8 U4.1 U4.5 U4.8 U5.1 U5.5 U5.8 U6.1 U6.5 U6.8 U7.1 U7.5 U7.8 U8.1 U8.5 U8.8
copper on no net:
  other v2: 1320,1870 4670,1870 8095,1870 1320,5230 4670,5230 8095,5320 1320,9280 4654,9280 8095,9280

## Polygon pours and split planes (outlines as drawn)
GND on Top Layer "Top Layer-GND" (solid, remove dead copper, pour order 8): 1040,9420 1040,935 1210,765 1240,795 8165,795 8440,1070 8385,1125 8385,9465
no net on Top Layer "Top Layer-No Net" (solid, pour order 14): 2800,6390 2790,6380 2790,5590 3880,5590 3885,5595 3830,5650 3830,6355
NetIN1_2 on Top Layer "Top Layer-NetIN1_2" (solid, pour order 0): 1175,7445 1520,7445 1520,7355 1175,7355
GND on Bottom Layer "Bottom Layer-GND" (solid, remove dead copper, pour order 6): 1160,9545 860,9245 860,945 1125,680 8235,680 8610,1055 8490,1175 8490,9485
V- on Bottom Layer "Bottom Layer-V-" (solid, pour order 12): 5400,9015 5475,9090 5615,9090 5700,9005 5700,8905 5735,8870 5890,8870 5920,8900 5920,9165 5870,9215 5245,9215 5185,9155 5185,8982.5
V+ on Bottom Layer "Bottom Layer-V+" (solid, pour order 10): 3750,9060 3440,9060 3420,9040 3420,8890 3475,8835 3740,8835
V- on Bottom Layer "Bottom Layer-V- 1" (solid, pour order 4): 5235,9065 5370,9065 5405,9030 5405,7200 5335,7130 5105,7130 5105,7220 5175,7220 5270,7315 5270,8855 5185,8940 5185,9025
V+ on Bottom Layer "Bottom Layer-V+ 1" (solid, pour order 2): 3750,9060 3710,9020 3710,8770 3810,8670 4130,8670 4265,8535 4265,7615 4297.72,7582.28 4390,7582.28 4430,7622.28 4430,8595 4245,8780 3970,8780 3900,8850 3900,9015 3855,9060

## Keep-outs
Keep-Out Layer:
  lines w10: 8275,9195 8275,9360 ccw(c8225,9360) 8225,9410 1195,9410 ccw(c1195,9360) 1145,9360 1145,9235 1145,1090 ccw(c1195,1090) 1195,1040 8225,1040 ccw(c8225,1090) 8275,1090 8275,9235

## Other copper
Top Layer:
  text "TerayTechEnterprise 2019" at 1290,1085 h60
  text "For Learning Propose Only" at 5505,1085 h100
Bottom Layer:
  rectangle net NetIN1_2: 1355,7355 1520,7445

## Silkscreen, mask and mechanical layers (free items; w line width, h text height)
Top Overlay:
  drawing of 1247 lines, arcs and shapes, not listed
  text "V+" at 3475,9145 h60
  text "TerayTech" at 6380,9090 h60
  text "Enterprise" at 6968,9085 h100
  text "V-" at 5925,8960 h60
  text "Ti Precision Lab" at 1856.96,8895 h60
  text "GND" at 4590,8810 h60
  text "Test Board 1, Rev. C" at 1855.87,8770 h60
  text "V+" at 3735,8710 h60
  text "GND" at 3925,8710 h60
  text "V-" at 5250,8710 h60
  text "GND" at 5440,8710 h60
  text "Circuit 1: Noninverting Amplifier" at 1640,8575 h100
  text "Circuit 2: Inverting Amplifier" at 4820,8575 h100
  text "Vin" at 5245,8285 h60
  text "Vin" at 1910,7861 h60
  text "Vout1" at 7330,7800 h60
  text "Vout1" at 4025,7755 h60
  text "Circuit 4: Cascaded Amplifiers 2" at 4820,6940 h100
  text "Circuit 3: Cascaded Amplifiers 1" at 1650,6935 h100
  text "Vout1" at 4115,6262.5 h60
  text "Vout2" at 7310,6250 h60
  text "Circuit 6: Riso Dual-Feedback Stability Circuit" at 4790,5295 h100
  text "Circuit 5: Riso Stability Circuit" at 1645,5290 h100
  text "Vin" at 5145,4715.12 h60
  text "Vin" at 1970,4661 h60
  text "Vout1" at 7305,4590 h60
  text "Vout1" at 4115,4565 h60
  text "Vout2" at 6340,4440 h60
  text "Circuit 8: Sallen-Key LPF" at 4820,3610 h100
  text "Circuit 7: Multiple-Feedback LPF" at 1650,3605 h100
  text "Vin" at 1825,3241 h60
  text "Vin" at 5385,3165 h60
  text "Vout1" at 7275,3065 h60
  text "Vout1" at 4100,2980 h60
  text "Jumper Storage" at 6750,1900 h60
  text "DIP Adapter Storage" at 1480,1800 h60
Bottom Overlay:
  drawing of 1776 lines, arcs and shapes, not listed
Top Solder:
  text "TerayTechEnterprise 2019" at 1290,1085 h60
  text "For Learning Propose Only" at 5505,1085 h100